# EAGLE board 4x4x4_led_cube (EAGLE 5.11)

Size 160 x 100 mm. Coordinates in mm from the lower left corner, seen from the top.
Outline: 0,0 160,0 160,100 0,100 0,0
Copper layers (1*16): Top 0.035mm / dielectric 1.5mm / Bottom 0.035mm
Design rules "default": minimum track width 10mil, minimum drill 24mil, track to track 8mil, track to pad 8mil, pad to pad 8mil, via to via 8mil, smd to smd 8mil, copper to edge 40mil, drill to drill 8mil, minimum pad ring 10mil, minimum via ring 8mil, stop-mask expansion 4mil, vias tented up to drill 0mil, thermal gap 10mil
Net classes: 0 default: width 0.152 mm, drill 0.305 mm, clearance 0.152 mm

## Footprints (pad centres in the part's own frame; a part is rotated, then mirrored left to right if it is on the bottom)
BATTCON_20MM = smd 5.08 x 5.08: 1 -12.827,0; 3 12.827,0 | smd 4.064 x 4.064: 2 0,0
C0805 = smd 1.3 x 1.5: 1 -0.95,0; 2 0.95,0
0402 = smd 0.635 x 0.635: 1 -0.445,0; 2 0.445,0
TP_3535 = smd 0.889 x 0.889: T 0,0
1206 = smd 1.27 x 1.524: 1 -1.27,0; 2 1.27,0
TQFP32-08 = smd 1.27 x 0.559: 1 -4.293,2.8; 2 -4.293,2; 3 -4.293,1.2; 4 -4.293,0.4; 5 -4.293,-0.4; 6 -4.293,-1.2; 7 -4.293,-2; 8 -4.293,-2.8; 17 4.293,-2.8; 18 4.293,-2; 19 4.293,-1.2; 20 4.293,-0.4; 21 4.293,0.4; 22 4.293,1.2; 23 4.293,2; 24 4.293,2.8 | smd 0.559 x 1.27: 9 -2.8,-4.293; 10 -2,-4.293; 11 -1.2,-4.293; 12 -0.4,-4.293; 13 0.4,-4.293; 14 1.2,-4.293; 15 2,-4.293; 16 2.8,-4.293; 25 2.8,4.293; 26 2,4.293; 27 1.2,4.293; 28 0.4,4.293; 29 -0.4,4.293; 30 -1.2,4.293; 31 -2,4.293; 32 -2.8,4.293
SOT23_ = smd 1.016 x 1.143: 1 -0.889,-1.016; 2 0.889,-1.016; 3 0,1.016
R1206 = smd 1.6 x 1.803: 1 -1.422,0; 2 1.422,0
D0603 = smd 0.762 x 0.889: + -0.762,0; - 0.762,0
MA06-1 = drill 1.016 long: 1 -6.35,0; 2 -3.81,0; 3 -1.27,0; 4 1.27,0; 5 3.81,0; 6 6.35,0
SO-24DW = smd 0.584 x 2.032: 1 -6.35,-5.08; 2 -5.08,-5.08; 3 -3.81,-5.08; 4 -2.54,-5.08; 5 -1.27,-5.08; 6 0,-5.08; 7 1.27,-5.08; 8 2.54,-5.08; 9 3.81,-5.08; 10 5.08,-5.08; 11 6.35,-5.08; 12 7.62,-5.08; 13 7.62,5.08; 14 6.35,5.08; 15 5.08,5.08; 16 3.81,5.08; 17 2.54,5.08; 18 1.27,5.08; 19 0,5.08; 20 -1.27,5.08; 21 -2.54,5.08; 22 -3.81,5.08; 23 -5.08,5.08; 24 -6.35,5.08
SSOP28 = smd 0.4 x 1.5: 1 -4.225,-3.625; 2 -3.575,-3.625; 3 -2.925,-3.625; 4 -2.275,-3.625; 5 -1.625,-3.625; 6 -0.975,-3.625; 7 -0.325,-3.625; 8 0.325,-3.625; 9 0.975,-3.625; 10 1.625,-3.625; 11 2.275,-3.625; 12 2.925,-3.625; 13 3.575,-3.625; 14 4.225,-3.625; 15 4.225,3.625; 16 3.575,3.625; 17 2.925,3.625; 18 2.275,3.625; 19 1.625,3.625; 20 0.975,3.625; 21 0.325,3.625; 22 -0.325,3.625; 23 -0.975,3.625; 24 -1.625,3.625; 25 -2.275,3.625; 26 -2.925,3.625; 27 -3.575,3.625; 28 -4.225,3.625
QFN32 = smd 0.3 x 0.6: 1 -1.75,-2.3; 2 -1.25,-2.3; 3 -0.75,-2.3; 4 -0.25,-2.3; 5 0.25,-2.3; 6 0.75,-2.3; 7 1.25,-2.3; 8 1.75,-2.3; 17 1.75,2.3; 18 1.25,2.3; 19 0.75,2.3; 20 0.25,2.3; 21 -0.25,2.3; 22 -0.75,2.3; 23 -1.25,2.3; 24 -1.75,2.3 | smd 0.6 x 0.3: 9 2.3,-1.75; 10 2.3,-1.25; 11 2.3,-0.75; 12 2.3,-0.25; 13 2.3,0.25; 14 2.3,0.75; 15 2.3,1.25; 16 2.3,1.75; 25 -2.3,1.75; 26 -2.3,1.25; 27 -2.3,0.75; 28 -2.3,0.25; 29 -2.3,-0.25; 30 -2.3,-0.75; 31 -2.3,-1.25; 32 -2.3,-1.75 | smd 3.2 x 3.2: EXP 0,0
CK_2X3 = drill 0.889 pad 1.651 square: 1 -1.27,2.54 | drill 0.889 pad 1.651 round: 2 -1.27,0; 3 -1.27,-2.54; 4 1.27,-2.54; 5 1.27,0; 6 1.27,2.54
5032 = smd 2.286 x 2.032: 1 -2.413,0; 2 2.413,0

## Placement (x,y rotation side)
BAT1  [BATTCON_20MM]  -29.21,10.16 0 top  (outside the outline)
C1  [C0805]  -27.94,44.45 0 top  (outside the outline)
C2  [C0805]  -33.02,44.45 0 top  (outside the outline)
C9  100nF  [0402]  -20.32,50.8 0 top  (outside the outline)
C10  10nF  [0402]  -24.13,50.8 0 top  (outside the outline)
D+  DNP  [TP_3535]  -15.24,53.34 0 top  (outside the outline)
D-  DNP  [TP_3535]  -19.05,53.34 0 top  (outside the outline)
F1  500mA  [1206]  -15.24,50.8 0 top  (outside the outline)
GND  DNP  [TP_3535]  -45.72,50.8 0 top  (outside the outline)
IC1  MEGA8-AI  [TQFP32-08]  -41.91,25.4 0 top  (outside the outline)
Q1  si2305DS  [SOT23_]  -39.37,45.72 0 top  (outside the outline)
R5  1K  [0402]  -27.94,50.8 0 top  (outside the outline)
R6  1K  [0402]  -31.75,50.8 0 top  (outside the outline)
R7  1k  [0402]  -35.56,50.8 0 top  (outside the outline)
R8  1k  [0402]  -39.37,50.8 0 top  (outside the outline)
R11  [R1206]  -22.86,44.45 0 top  (outside the outline)
RX  RED  [D0603]  -43.18,44.45 0 top  (outside the outline)
SV1  [MA06-1]  -43.18,36.83 0 top  (outside the outline)
TX  RED  [D0603]  -46.99,44.45 0 top  (outside the outline)
U2  CD74HC154M  [SO-24DW]  -21.59,26.67 0 top  (outside the outline)
U3  FT232RL  [SSOP28]  -27.94,38.1 0 top  (outside the outline)
U5V  DNP  [TP_3535]  -50.8,50.8 0 top  (outside the outline)
U$17  TLC5947  [QFN32]  -17.78,38.1 0 top  (outside the outline)
UART  DNP  [CK_2X3]  -33.02,26.67 0 top  (outside the outline)
X1  [5032]  -16.51,45.72 0 top  (outside the outline)

## Library data of the parts
BAT1 U2 = SparkFun
C1 C2 R11 = rcl
C9 C10 F1 Q1 R5-R8 RX TX = Discrete
D+ D- GND U5V = For_Test_Albert
IC1 = atmel; MPN: ATMEGA8-16AU; OC_FARNELL: 9171371; OC_NEWARK: 73M8863
SV1 = NSL
U3 = ICs_v54
U$17 = lil_rgb
UART = Connector
X1 = NSL_MiniQuad

## Nets
5V: F1.2
!CS: IC1.14
A0: IC1.26 U2.23
A1: IC1.27 U2.22
A2: IC1.28 U2.21
A3: IC1.32 U2.20
BLANK: IC1.23 U$17.30
BUTTON: IC1.1
COL1: U$17.1
COL2: U$17.2
COL3: U$17.3
COL4: U$17.4
COL5: U$17.5
COL6: U$17.6
COL7: U$17.7
COL8: U$17.8
COL9: U$17.9
COL10: U$17.10
COL11: U$17.11
COL12: U$17.12
COL13: U$17.13
COL14: U$17.14
COL15: U$17.15
COL16: U$17.16
COL17: U$17.17
COL18: U$17.18
COL19: U$17.19
COL20: U$17.20
COL21: U$17.21
COL22: U$17.22
COL23: U$17.23
COL24: U$17.24
CTS: U3.11 UART.3
D+: D+.T U3.15
D-: D-.T U3.16
DCD: U3.10 UART.4
DSR: U3.9 UART.2
DTR: U3.2 UART.6
FT_RX: R7.1 U3.5
FT_TX: R8.1 U3.1
GATE: Q1.1
GND: BAT1.2 C1.2 C2.2 C9.1 C10.1 GND.T IC1.3 IC1.5 IC1.21 R11.1 SV1.6 U2.12 U2.18 U2.19 U3.7 U3.18 U3.21 U3.25 U3.26 U$17.29
IN_5V: F1.1 Q1.2
INT1/DRDY: IC1.13
INT2: IC1.12
LED_RX: RX.- U3.23
LED_TX: TX.- U3.22
MIC: IC1.25
MISO: IC1.16 SV1.2
MOSI: IC1.15 SV1.1
N$1: C9.2 U3.17 U3.19
N$7: C1.1 IC1.7 X1.2
N$8: C2.1 IC1.8 X1.1
N$13: R11.2 U$17.27
N$34: R5.1 TX.+
N$35: R6.1 RX.+
RI: U3.6 UART.5
ROW1: U2.1
ROW2: U2.2
ROW3: U2.3
ROW4: U2.4
ROW5: U2.5
ROW6: U2.6
ROW7: U2.7
ROW8: U2.8
ROW9: U2.9
ROW10: U2.10
ROW11: U2.11
ROW12: U2.13
ROW13: U2.14
ROW14: U2.15
ROW15: U2.16
ROW16: U2.17
RST: IC1.29 SV1.5
RTS: U3.3 UART.1
RX: IC1.30 R8.2
SCK: IC1.17 SV1.3
SCL/SPC: IC1.10
SCLK: IC1.22 U$17.31
SDA/SDI/SDO: IC1.11
SDO: IC1.9
SIN: IC1.19 U$17.32
SOUT: IC1.2 U$17.25
TX: IC1.31 R7.2
USB_5V: C10.2 Q1.3 R5.2 R6.2 U3.20 U5V.T
VCC: BAT1.1 IC1.4 IC1.6 IC1.18 IC1.20 SV1.4 U2.24 U3.4 U$17.28
XLAT: IC1.24 U$17.26

## Tracks (layer width: path | path; a pad name or v marks a point on that pad's centre or on a via)
A0  (1 unrouted)
A1  (1 unrouted)
A2  (1 unrouted)
A3  (1 unrouted)
BLANK  (1 unrouted)
CTS  (1 unrouted)
D+  (1 unrouted)
D-  (1 unrouted)
DCD  (1 unrouted)
DSR  (1 unrouted)
DTR  (1 unrouted)
FT_RX  (1 unrouted)
FT_TX  (1 unrouted)
GND  (19 unrouted)
IN_5V  (1 unrouted)
LED_RX  (1 unrouted)
LED_TX  (1 unrouted)
MISO  (1 unrouted)
MOSI  (1 unrouted)
N$1  (2 unrouted)
N$7  (2 unrouted)
N$8  (2 unrouted)
N$13  (1 unrouted)
N$34  (1 unrouted)
N$35  (1 unrouted)
RI  (1 unrouted)
RST  (1 unrouted)
RTS  (1 unrouted)
RX  (1 unrouted)
SCK  (1 unrouted)
SCLK  (1 unrouted)
SIN  (1 unrouted)
SOUT  (1 unrouted)
TX  (1 unrouted)
USB_5V  (5 unrouted)
VCC  (8 unrouted)
XLAT  (1 unrouted)